# Altium PCB Module_BuckMini_MP2315GJ_5V_Panel.PcbDoc
Units mm, origin at the board's own origin, x right, y up, seen from the top; angles counter-clockwise.
Board outline 71.75 x 73.15 mm, 2 copper layers (Top Layer, Bottom Layer); 4 components, 0 nets, 12 pads, 0 vias.
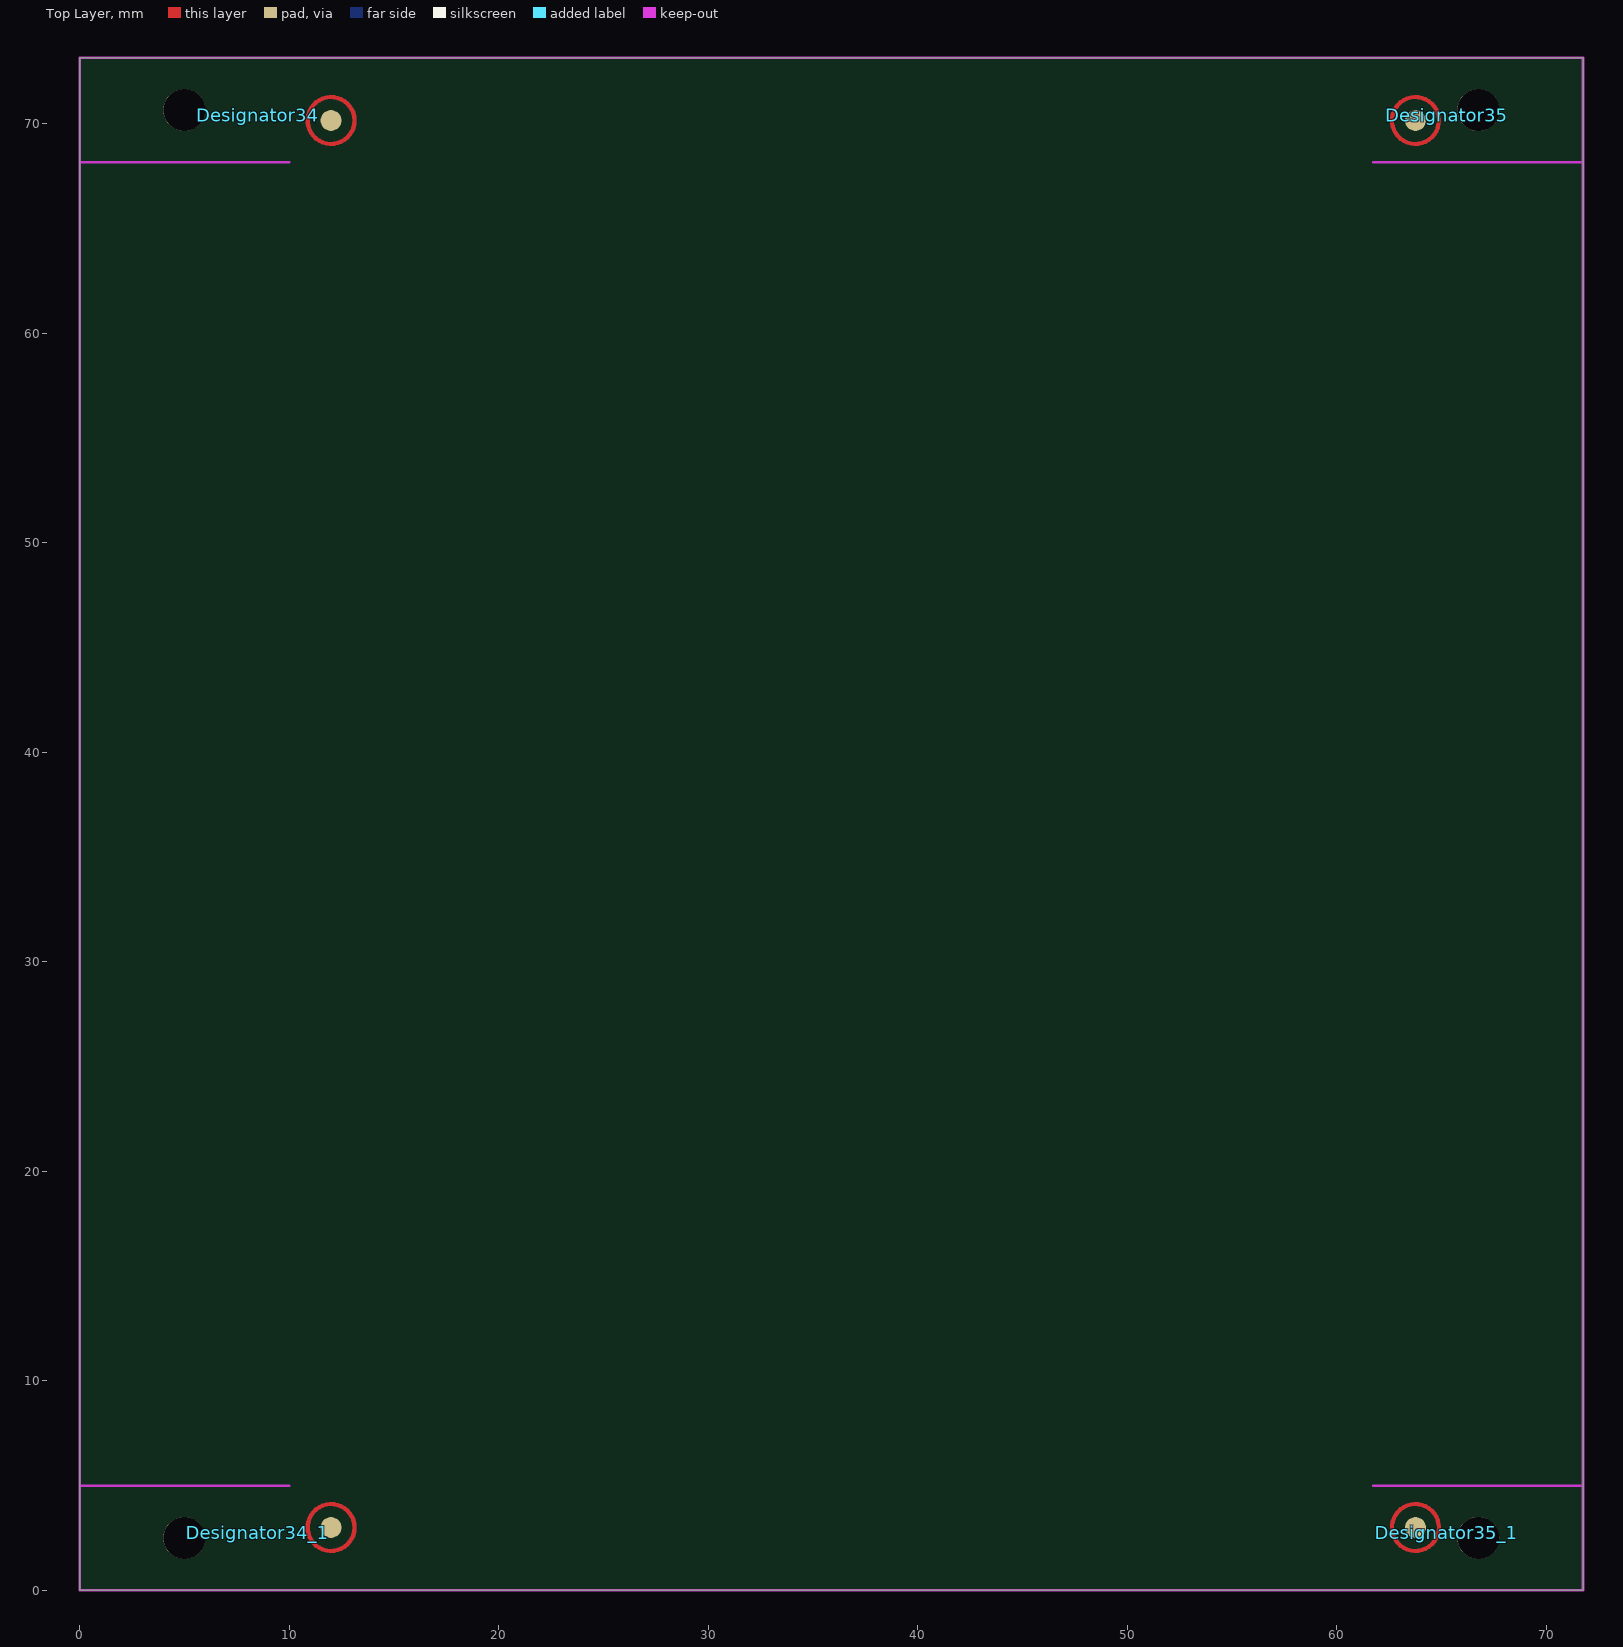
[diagram p0: Top Layer view]
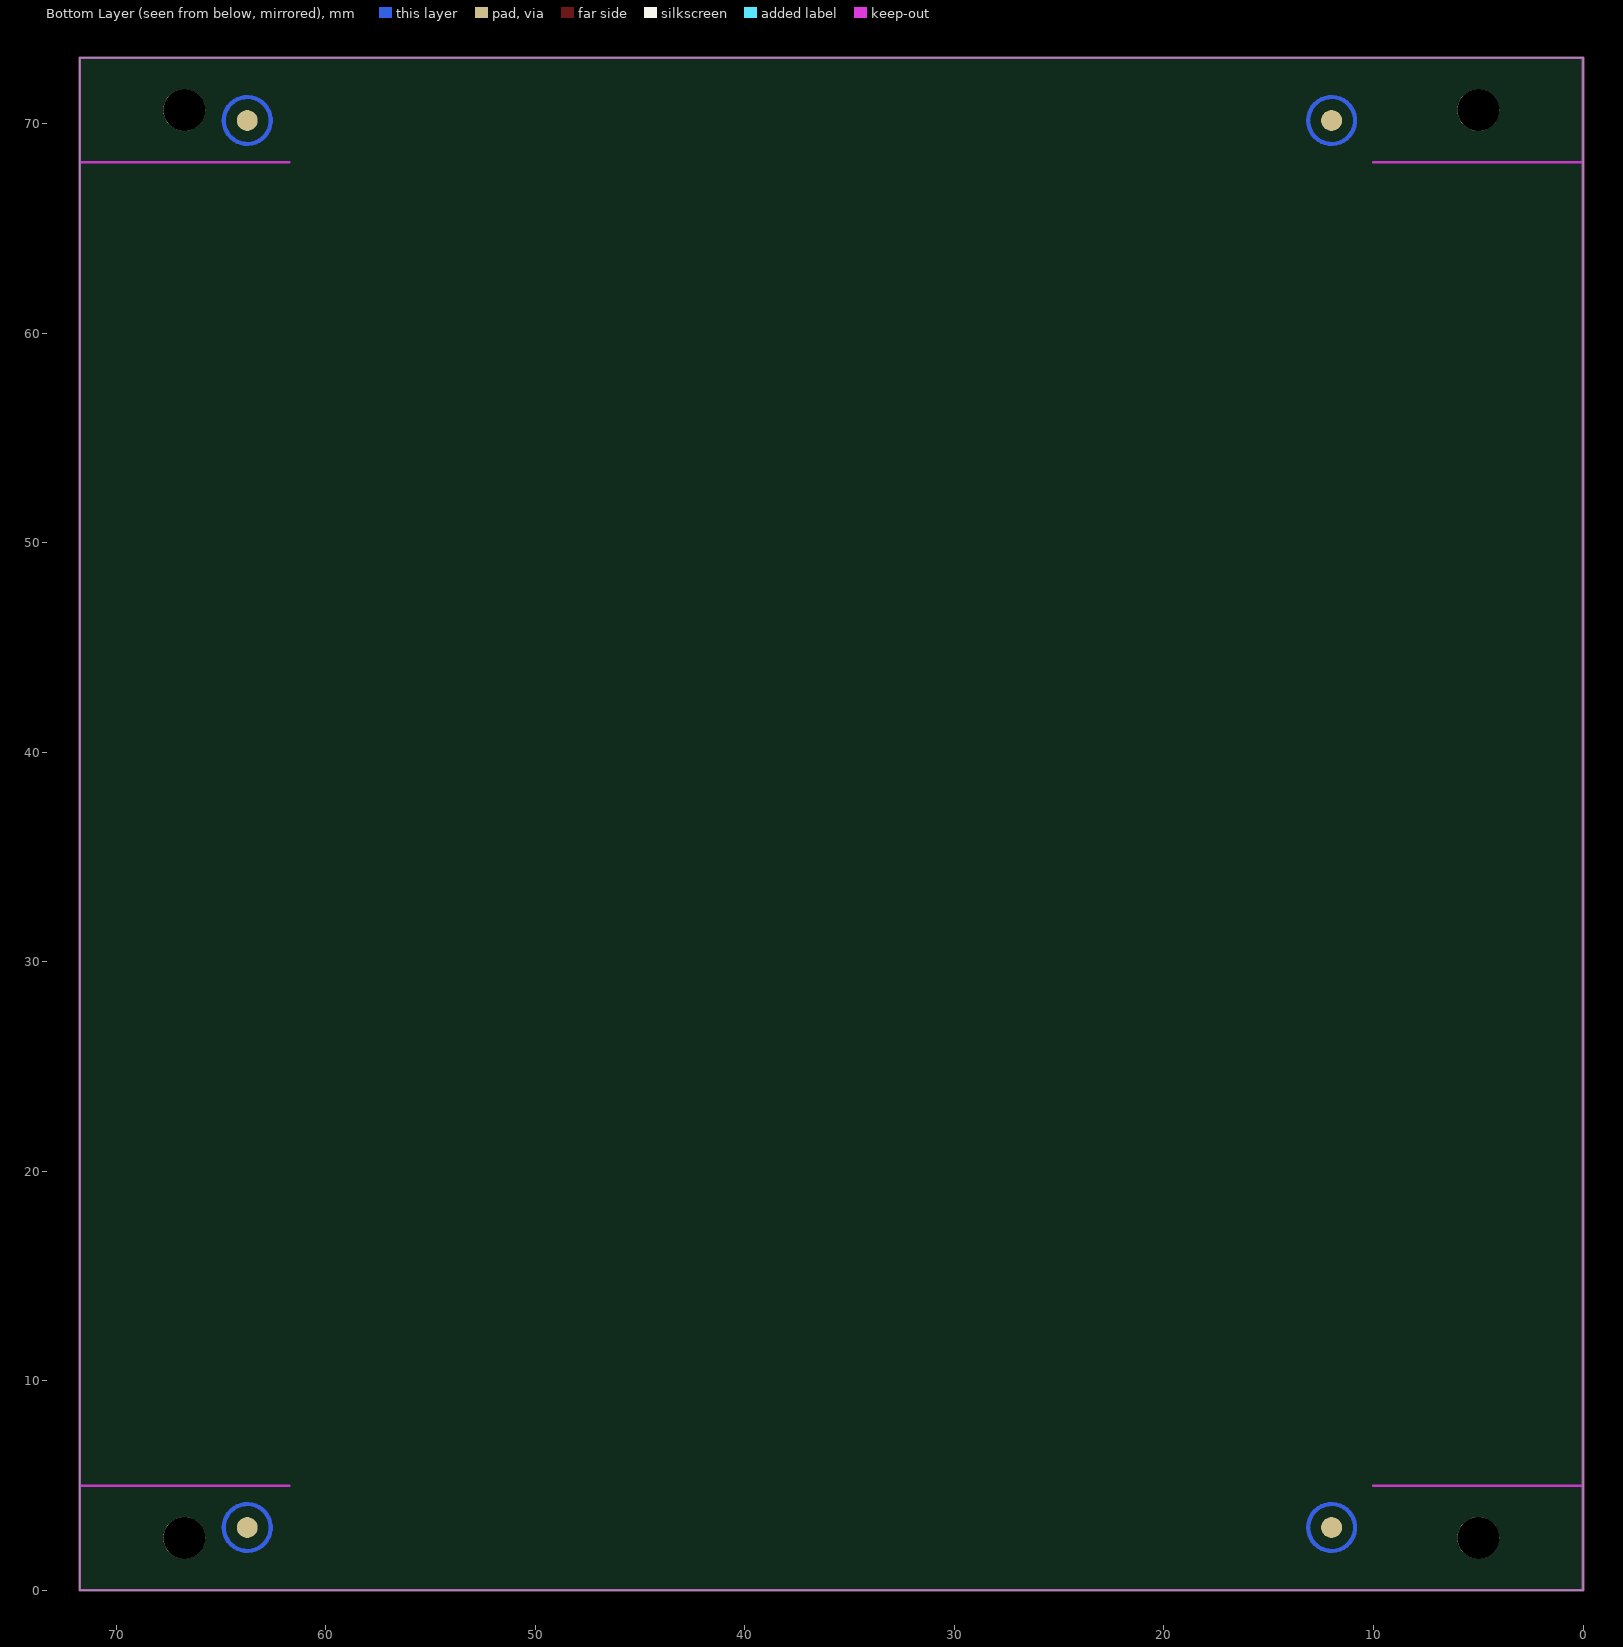
[diagram p1: Bottom Layer view, seen from below]

## Layer stack, top to bottom
Top Solder: solder mask 0.0102, Solder Resist, Dk 3.5
Top Layer: signal copper 0.0356
Dielectric 1: dielectric 0.32, FR-4, Dk 4.8
Bottom Layer: signal copper 0.0356
Bottom Solder: solder mask 0.0102, Solder Resist, Dk 3.5

## Board outline
0,0 0,73.148 71.75,73.148 71.75,0

## Design rules (kind name [scope] priority, off if disabled: settings)
Clearance [All] p1: gap=0.254 ignorepadtopadclearanceinfootprint=FALSE except(0: Arc-Hole Track-Hole SMDPad-Hole THPad-Hole Via-Hole Fill-Hole Poly-Hole Region-Hole Text-Hole)
PolygonConnect [All] p1: connectstyle=Relief reliefconductorwidth=0.254 reliefentries=4 polygonreliefangle="90 Angle" airgapwidth=0.254
RoutingVias [All] p1: holewidth=0.711 width=1.27 viastyle="Through Hole" minholewidth=0.711 minwidth=1.27 maxholewidth=0.711 maxwidth=1.27
SolderMaskExpansion [All] p1: expansion=0.102 istentingtop=FALSE
Width [All] p1: maxlimit=0.254 minlimit=0.254 preferedwidth=0.254
30 further rules are at their usual default settings.

## Components (designator, comment, footprint, x,y, rotation, side; value= is the part's Value field where it differs from the comment)
Designator34 "Comment" MARK_FRAME_5#1 0,68.148 r0 top
Designator34_1 "Comment" MARK_FRAME_5#2 0,5 r0 top
Designator35 "Comment" MARK_FRAME_6#1 71.75,68.148 r180 top
Designator35_1 "Comment" MARK_FRAME_6#2 71.75,5 r180 top

## Footprints (in the part's own frame and the unit in brackets; to place one, negate y for a bottom-side part, rotate by r counter-clockwise, add the part's x,y. Pads: shape width x height; smd on the part's side, far side on the other; paste and mask are expansions set on the pad)
MARK_FRAME_5#1 [mm]
  round 2 hole 2 unplated: 0(5,2.5)
  round 1 smd paste-2539.97 mask+0.5: 0(12,2)
  round 1 smd far side paste+0 mask+0.5: 0(12,2)
  Top Layer circle w0.2: c12,2 r1.12
  Bottom Layer circle w0.2: c12,2 r1.12
  Keep-Out Layer lines w0.127: 10,0 0,0 0,5 10,5
MARK_FRAME_5#2 [mm]
  round 2 hole 2 unplated: 0(5,-2.5)
  round 1 smd paste-2539.97 mask+0.5: 0(12,-2)
  round 1 smd far side paste+0 mask+0.5: 0(12,-2)
  Top Layer circle w0.2: c12,-2 r1.12
  Bottom Layer circle w0.2: c12,-2 r1.12
  Keep-Out Layer lines w0.127: 10,-5 0,-5 0,0 10,0
MARK_FRAME_6#1 [mm]
  round 2 hole 2 unplated: 0(5,-2.5)
  round 1 smd paste-2539.97 mask+0.5: 0(8,-2)
  round 1 smd far side paste+0 mask+0.5: 0(8,-2)
  Top Layer circle w0.2: c8,-2 r1.12
  Bottom Layer circle w0.2: c8,-2 r1.12
  Keep-Out Layer lines w0.127: 10,0 0,0 0,-5 10,-5
MARK_FRAME_6#2 [mm]
  round 2 hole 2 unplated: 0(5,2.5)
  round 1 smd paste-2539.97 mask+0.5: 0(8,2)
  round 1 smd far side paste+0 mask+0.5: 0(8,2)
  Top Layer circle w0.2: c8,2 r1.12
  Bottom Layer circle w0.2: c8,2 r1.12
  Keep-Out Layer lines w0.127: 10,5 0,5 0,0 10,0

## Nets (pads, with @x,y where several pads share a name; then routed paths per layer and width w, separated by ;. In a path a pad name is that pad's centre, name@x,y a point inside that pad or via, vN(x,y) a via of type N, cw(c..) or ccw(c..) an arc to the next point about the centre after c; other vN are vias at no path point)
pads on no net: Designator34.0 Designator34_1.0 Designator35.0 Designator35_1.0

## Keep-outs
Keep-Out Layer:
  the board outline again, w0.127

## Panel: embedded boards
"Module_BuckMini_MP2315GJ_5V.PcbDoc" at 0,5, 6 rows x 5 columns, spacing 10.525 x 14.35, rotation 0